# Altium PCB Motor_driver.PcbDoc
Units mm, origin at the board's own origin, x right, y up, seen from the top; angles counter-clockwise.
Board outline 147.7 x 29 mm, 2 copper layers (Top Layer, Bottom Layer); 34 components, 32 nets, 129 pads, 250 vias.
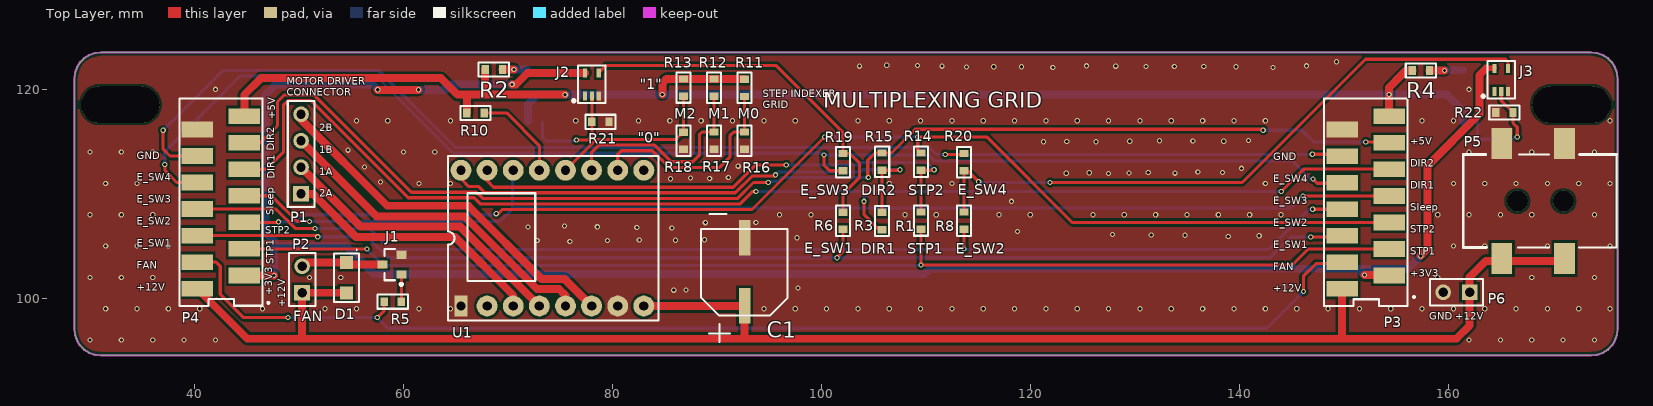
[diagram p0: Top Layer view]
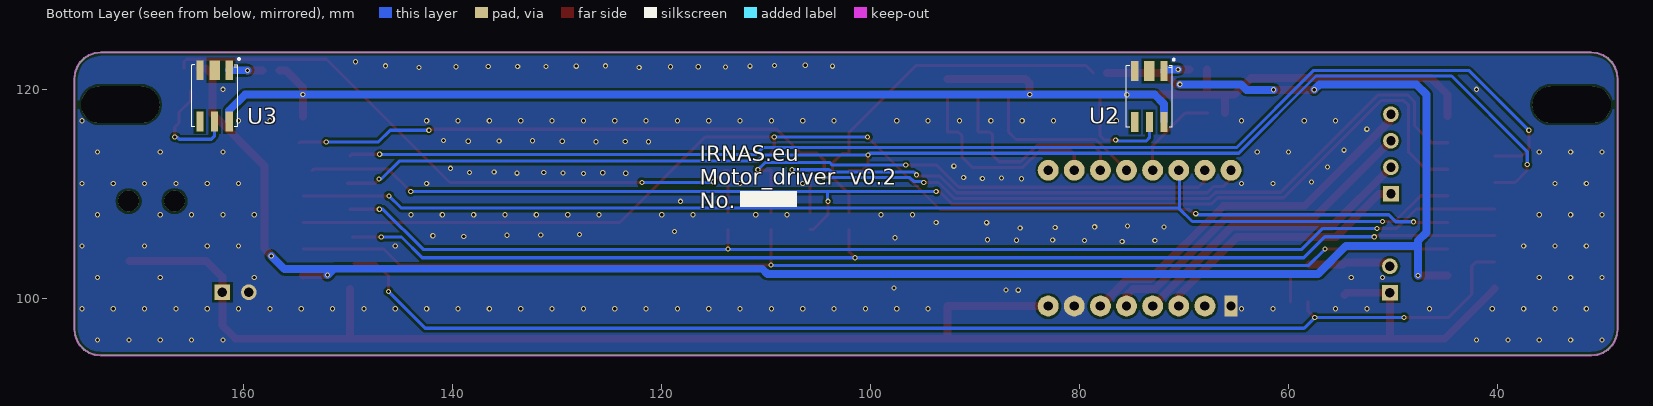
[diagram p1: Bottom Layer view, seen from below]

## Layer stack, top to bottom
Top Solder: solder mask 0.0102, Solder Resist, Dk 3.5
Top Layer: signal copper 0.0356
Dielectric 1: dielectric 0.32, FR-4, Dk 4.8
Bottom Layer: signal copper 0.0356
Bottom Solder: solder mask 0.0102, Solder Resist, Dk 3.5

## Board outline
28.512,121.032 28.512,97.032 28.575,96.476 28.76,95.947 29.057,95.473 29.453,95.078 29.927,94.78 30.456,94.595 31.012,94.532 173.712,94.532 174.268,94.595 174.797,94.78 175.271,95.078 175.667,95.473 175.964,95.947 176.149,96.476 176.212,97.032 176.212,121.032 176.149,121.588 175.964,122.117 175.667,122.591 175.271,122.987 174.797,123.285 174.268,123.469 173.712,123.532 31.012,123.532 30.456,123.469 29.927,123.285 29.453,122.987 29.057,122.591 28.76,122.117 28.575,121.588

## Design rules (kind name [scope] priority, off if disabled: settings)
Clearance [All] p1: gap=0.229 ignorepadtopadclearanceinfootprint=FALSE except(0: Arc-Hole Track-Hole SMDPad-Hole THPad-Hole Via-Hole Fill-Hole Poly-Hole Region-Hole Text-Hole)
HoleSize [All] p1: absolutevalues=TRUE maxlimit=8 minlimit=0.025 maxpercent=80.000 minpercent=20.000
PlaneConnect [All] p1: planeconnectstyle=Direct reliefexpansion=0.508 reliefentries=4 reliefconductorwidth=0.254 reliefairgap=0.254
PolygonConnect [All] p1: connectstyle=Direct reliefconductorwidth=0.254 reliefentries=4 polygonreliefangle="90 Angle" airgapwidth=0.254
RoutingVias [All] p1: holewidth=0.3 width=0.5 viastyle="Through Hole" minholewidth=0.3 minwidth=0.5 maxholewidth=0.3 maxwidth=0.5
SilkToSilkClearance [All] p1: silktosilkclearance=0.15
SilkToSolderMaskClearance [IsPad] p1: minsilkscreentomaskgap=0.1 clearancetoexposedcopper=TRUE
SolderMaskExpansion [All] p1: expansion=0.102
Width [All] p1: maxlimit=0.762 minlimit=0.203 preferedwidth=0.254
26 further rules are at their usual default settings.

## Components (designator, comment, footprint, x,y, rotation, side; value= is the part's Value field where it differs from the comment)
C1 "100uF" EEEFK1J470P 92.65,101.23 r90 top
D1 "Schotky" SCHOTKY 54.46,101.83 r270 top
J1 "N-mosfet" SOT_Nmos 58.92,103.2 r180 top
J2 "Schmit trigger" SOT65P212X112-5N 78.04,120.48 r90 top
J3 "Schmit trigger" SOT65P212X112-5N 165.08,120.91 r90 top
P1 "Header 4" HDR1X4 50.2,110 r90 top
P2 "Header 2" HDR1X2 50.3,100.53 r90 top
P3 "micro_Match conn" micro_Match 152.16,108.68 r180 top
P4 "micro_Match conn" micro_Match 42.58,108.69 r180 top
P5 "FC68148S" "DC power connector" 168.68,109.25 r90 top
P6 "Header 2" HDR1X2 162.06,100.58 r180 top
R1 "0R" 0603res 109.43,107.33 r90 top
R2 "330R" 0603res 68.76,121.79 r180 top
R3 "0R" 0603res 105.7,107.29 r90 top
R4 "330R" 0603res 157.5,121.7 r180 top
R5 "10K" 0603res 58.87,99.79 r0 top
R6 "0R" 0603res 101.95,107.31 r90 top
R8 "0R" 0603res 113.54,107.32 r90 top
R10 "10K" 0603res 67.01,117.63 r180 top
R11 "0R" 0603res 92.53,120.04 r90 top
R12 "0R" 0603res 89.61,120.05 r90 top
R13 "0R" 0603res 86.68,120.06 r90 top
R14 "0R" 0603res 109.67,113.19 r270 top
R15 "0R" 0603res 105.94,113.19 r270 top
R16 "0R" 0603res 92.52,114.98 r90 top
R17 "0R" 0603res 89.61,114.98 r90 top
R18 "0R" 0603res 86.68,114.97 r90 top
R19 "0R" 0603res 101.95,112.92 r90 top
R20 "0R" 0603res 113.77,113.14 r270 top
R21 "10K" 0603res 78.97,116.78 r180 top
R22 "10K" 0603res 165.275,117.905 r0 top
U1 "Polulu-DRV8825" DIP16 65.51,99.26 r90 top
U2 "END_SW" END_SWITCH 73.32,121.77 r270 bottom
U3 "END_SW" END_SWITCH 162.8,121.83 r270 bottom

## Footprints (in the part's own frame and the unit in brackets; to place one, negate y for a bottom-side part, rotate by r counter-clockwise, add the part's x,y. Pads: shape width x height; smd on the part's side, far side on the other; paste and mask are expansions set on the pad)
0603res [mm]
  rect 0.7x0.85 smd: 1(-0.715,-0.115) 2(0.935,-0.115)
  silkscreen extent -1.34,-0.79 1.56,0.56, body extent -0.69,-0.52 0.91,0.28, height 0.6
"DC power connector" [mm]
  rect 3x2 smd: 1(-5.439,-2.451) 2(-5.439,3.549) 3(5.561,3.549) 4(5.561,-2.451)
  round 2 hole 2 unplated: 5(0.061,-2.351) 6(0.061,2.049)
  silkscreen extent -4.39,-7.45 4.51,7.25
DIP16 [mm]
  rect 2x1.2 hole 0.9: 1(0,0)
  round 2 hole 0.9: 2(0,-2.5) 3(0,-5) 4(0,-7.5) 5(0,-10) 6(0,-12.5) 7(0,-15) 8(0,-17.5) 9(13,-17.5) 10(13,-15) 11(13,-12.5) 12(13,-10) 13(13,-7.5) 14(13,-5) 15(13,-2.5) 16(13,0)
  silkscreen extent -1.4,-18.92 14.35,1.25
EEEFK1J470P [mm]
  rect 3.4x1.1 smd: 1(-1.96,0) 2(4.55,0)
  silkscreen extent -5.43,-4.12 6.84,4.18, body extent -3.65,-4.15 6.25,4.15, height 10.21
END_SWITCH [mm]
  rect 1.9x0.7 smd: 1(0,1.4) 3(0,-1.4) 4(4.9,-1.4) 5(4.9,0) 6(4.9,1.4)
  rect 1.9x1 smd: 2(0,0)
  silkscreen extent -1.14,-2.2 5.41,2.39, body extent -0.52,-2.2 5.42,2.18, height 4
HDR1X2 [mm] "Connector; Header; 2 Position"
  rect 1.5x1.5 hole 0.9: 1(0,0)
  round 1.5 hole 0.9: 2(2.54,0)
  silkscreen extent -1.27,-1.27 3.81,1.27
HDR1X4 [mm] "Connector; Header; 4 Position"
  rect 1.5x1.5 hole 0.9: 1(0,0)
  round 1.5 hole 0.9: 2(2.54,0) 3(5.08,0) 4(7.62,0)
  silkscreen extent -1.27,-1.27 8.89,1.27
micro_Match [mm]
  rect 3x1.5 smd: 1(-2.19,6.5) 2(-2.19,3.96) 3(-2.19,1.42) 4(-2.19,-1.12) 5(-2.19,-3.66) 6(-2.19,-6.2) 7(-2.19,-8.74) 8(2.31,-7.47) 9(2.31,-4.93) 10(2.31,-2.39) 11(2.31,0.15) 12(2.31,2.69) 13(2.31,5.23) 14(2.31,7.77)
  silkscreen extent -4.62,-10.43 4.03,9.42, body extent -3.47,-10.38 3.53,9.33, height 5
SCHOTKY [mm]
  rect 1.25x1.22 smd: 1(-1.615,0.09) 2(1.335,0.09)
  silkscreen extent -2.86,-1.11 2.19,1.29, body extent -1.81,-0.81 1.53,0.99, height 1
SOT65P212X112-5N [mm] "SOT23, 5-Leads, Body 2.05x2.13mm, Pitch 0.65mm, IPC Medium Density"
  rect 0.85x0.4 smd: 1(-1.1,0.65) 2(-1.1,0) 3(-1.1,-0.65) 4(1.1,-0.65) 5(1.1,0.65)
  silkscreen extent -1.79,-1.32 1.82,1.85, body extent -1.12,-1.12 1.12,1.13, height 1.12
SOT_Nmos [mm]
  rect 0.97x0.8 smd: 1(-0.88,0.92) 2(-0.88,-0.98) 3(0.92,-0.03)
  silkscreen extent -1.01,-1.53 0.72,1.99, body extent -1.3,-1.53 1.34,1.47, height 1.12

## Part data
C1: "Cap Aluminum Lytic 100uF 50V 20% (8 X 10.2mm) SMD 350mA 2000h 105C Automotive T/R", Capacitance="100 µF", Lifetime@Temperature="2000 Hrs @ 105°C", Manufacturer=Panasonic, Manufacturer Part Number=EEE-FK1H101P, Operating Temp-Max="105 °C", Operating Temp Range="-55 to +105 °C", Rated Voltage="50 V", Ripple Current="350 mA", Supplier Part Number 1=9695958, Dimension="Ø 8 x 10.2 mm", Impedance="0.34 O", Series=FK, Stock 1=0, Supplier 1=Farnell, Type=V-Chip
D1: library part NRVTS245ESFT1G, "ON SEMICONDUCTOR         NRVTS245ESFT1G             Schottky Rectifier, Single, 45 V, 2 A, SOD-123, 2 Pins, 650 mV", If - Forward Current="2 A", Ifsm - Forward Surge Current="50 A", Ir - Reverse Current="75 uA", Manufacturer="ON Semiconductor", Maximum Operating Temperature="+ 175 C", Minimum Operating Temperature="- 65 C", Package / Case=SOD-123FL-2, Supplier Part Number 1=2473409, Vf - Forward Voltage="650 mV", Vr - Reverse Voltage="45 V", Brand="ON Semiconductor", Configuration=Single, Factory Pack Quantity=3000, Manufacturer Part Number=NRVTS245ESFT1G, Mounting Style=SMD/SMT, Packaging=Reel, Pricing 1="5=0.195, 25=0.14, 100=0.0844, 250=0.0724, 500=0.0605, 1000=0.0485, 5000=0.0455 (EUR)", Product="Schottky Rectifiers", Product Category="Schottky Diodes & Rectifiers", RoHS=True, Stock 1=14714, Supplier 1=Farnell, Technology=Si, Vrrm - Repetitive Reverse Voltage="45 V"
J1: library part IRLML6346TRPBF, "INFINEON         IRLML6346TRPBF.             MOSFET Transistor, N Channel, 3.4 A, 30 V, 0.046 ohm, 4.5 V, 800 mV", Current - Continuous Drain (Id) @ 25°C="3.4A (Ta)", Drain to Source Voltage (Vdss)=30V, Input Capacitance (Ciss) @ Vds="270pF @ 24V", Manufacturer=Infineon, Operating Temperature="-55°C ~ 150°C (TJ)", Package / Case="TO-236-3, SC-59, SOT-23-3", Power - Max=1.3W, Supplier Device Package=Micro3™/SOT-23, Supplier Part Number 1=1857300, Category="Discrete Semiconductor Products", Family="Transistors - FETs, MOSFETs - Single", FET Feature=Standard, FET Type="MOSFET N-Channel, Metal Oxide", Gate Charge (Qg) @ Vgs="2.9nC @ 4.5V", Manufacturer Part Number=IRLML6346TRPBF, Mounting Type="Surface Mount", Packaging="Tape & Reel (TR)", Part Status=Active, Pricing 1="5=0.242, 25=0.176, 100=0.11, 250=0.0975, 500=0.0849, 1000=0.0724, 5000=0.0617 (EUR)", Rds On (Max) @ Id, Vgs="63 mOhm @ 3.4A, 4.5V", Series=HEXFET®, Stock 1=11546, Supplier 1=Farnell, Vgs(th) (Max) @ Id="1.1V @ 10µA"
J2 J3: library part 74AHC1G14GW@125, "74AHC1G14GW@125", Manufacturer="NXP Semiconductors", Supplier Part Number 1=1085241, Manufacturer Part Number=74AHC1G14GW@125, Pricing 1="5=0.153, 50=0.108, 100=0.062, 250=0.059, 500=0.043 (EUR)", Stock 1=10993, Supplier 1=Farnell
P1: "Header, 4-Pin", LatestRevisionDate=17-Jul-2002, LatestRevisionNote="Re-released for DXP Platform.", Publisher="Altium Limited"
P2 P6: "Header, 2-Pin", LatestRevisionDate=17-Jul-2002, LatestRevisionNote="Re-released for DXP Platform.", Publisher="Altium Limited"
P3 P4: library part micro_Match, "AMP FROM TE CONNECTIVITY         1-2178711-4             Wire-To-Board Connector, Micro-MaTch Value-Line Series, 14 Contacts, Receptacle, 1.27 mm", Manufacturer="TE Connectivity AMP", Manufacturer Part Number=1-2178711-4, Supplier Part Number 1=2473362, Body Orientation=Straight, Contact Material="Copper Alloy", Mounting Type="Surface Mount", Number of Contacts=14, Number of Rows=2, Pitch=1.27mm, Pricing 1="1=1.24, 25=1.15, 70=1.06, 200=0.977, 450=0.89 (EUR)", Series=Micro-MaTch, Stock 1=904, Supplier 1=Farnell, Termination Method=Solder, Type="Board to Board"
P5: library part "DC 2.1mm power connector", "DC 2.1mm connector", Current Rating=2A, Manufacturer=Cliff, Supplier Part Number 1=1889309, Voltage Rating=12V, Barrel Inner Diameter=-, Barrel Length=-, Barrel Outer Diameter=6.4mm, ComponentLink1Description=http://www.farnell.com/datasheets/1864271.pdf, ComponentLink1URL=http://www.farnell.com/datasheets/1864271.pdf, Connector Mounting="Surface Mount", Contact Termination Type="Surface Mount", Gender=Jack, Manufacturer Part Number=FC68148S, Pin Diameter=2.1mm, Product Range=-, Stock 1=0, Supplier 1=Farnell, SVHC="No SVHC (17-Dec-2015)"
R1 R3 R6 R8 R11 R12 R13 R14 R15 R16 R17 R18 R19 R20: "RES SMD 0.0OHM JUMPER 1/20W 0201", Case Code - in=0201, Case Code - mm=0603, Manufacturer=Vishay, Manufacturer Part Number=CRCW02010000Z0ED, Operating Temperature Range="- 55 C to + 155 C", Package / Case="0201 (0603 metric)", Resistance="0 Ohms", Supplier Part Number 1=2139811, Brand="Vishay / Dale", ComponentLink1Description=https://datasheet.ciiva.com/2471/crcw0201e3-2471712.pdf, ComponentLink1URL=https://datasheet.ciiva.com/2471/crcw0201e3-2471712.pdf, ComponentLink2Description=https://datasheet.ciiva.com/2471/crcw0201e3-2471713.pdf, ComponentLink2URL=https://datasheet.ciiva.com/2471/crcw0201e3-2471713.pdf, ComponentLink3Description=https://datasheet.ciiva.com/7841/1719906-7841430.pdf, ComponentLink3URL=https://datasheet.ciiva.com/7841/1719906-7841430.pdf, ComponentLink4Description=https://datasheet.ciiva.com/7841/1719906-7841431.pdf, ComponentLink4URL=https://datasheet.ciiva.com/7841/1719906-7841431.pdf, ComponentLink5Description=https://datasheet.ciiva.com/22665/1847332-22665688.pdf, ComponentLink5URL=https://datasheet.ciiva.com/22665/1847332-22665688.pdf, ComponentLink6Description=https://datasheet.ciiva.com/16757/70202042-16757849.pdf, ComponentLink6URL=https://datasheet.ciiva.com/16757/70202042-16757849.pdf, ComponentLink7Description=https://datasheet.ciiva.com/16436/crcw0201e3-16436237.pdf, ComponentLink7URL=https://datasheet.ciiva.com/16436/crcw0201e3-16436237.pdf, ComponentLink8Description=https://datasheet.ciiva.com/2471/crcw0201e3-2471711.pdf, ComponentLink8URL=https://datasheet.ciiva.com/2471/crcw0201e3-2471711.pdf, Factory Pack Quantity=10000, Height="0.23 mm", Length="0.6 mm", Packaging=Reel, Product="Thick Film Resistors Zero-Ohm", Product Category="Thick Film Resistors - SMD", RoHS=Details, Series=CRCW, Stock 1=0, Supplier 1=Farnell, Termination Style=SMD/SMT, Unit Weight="0.000006 oz", Width="0.3 mm"
R2 R4: "RES SMD 330 OHM 0.1% 1/10W 0603", Manufacturer="Panasonic Electronic Components", Manufacturer Part Number=ERA-3AEB331V, Operating Temperature="-55°C ~ 155°C", Package / Case="0603 (1608 Metric)", Power (Watts)="0.1W, 1/10W", Supplier Device Package=0603, Supplier Part Number 1=P330DBTR-ND, Temperature Coefficient=±25ppm/°C, Tolerance=±0.1%, Category=Resistors, ComponentLink1Description=https://industrial.panasonic.com/cdbs/www-data/pdf/RDM0000/AOA0000C307.pdf, ComponentLink1URL=https://industrial.panasonic.com/cdbs/www-data/pdf/RDM0000/AOA0000C307.pdf, Composition="Thin Film", Failure Rate=-, Features="Automotive AEC-Q200", Height - Seated (Max)="0.022\" (0.55mm)", Packaging="Tape & Reel (TR)", Part Status=Active, Pricing 1="5000=0.03717, 10000=0.03469, 25000=0.03422 (USD)", RoHS="RoHS Compliant", Size / Dimension="0.063\" L x 0.032\" W (1.60mm x 0.80mm)", Stock 1=125000, Supplier 1=Digi-Key
R5 R10 R21 R22: "RES SMD 10K OHM 1% 1/20W 0201", Case Code - in=0201, Case Code - mm=0603, Manufacturer=Vishay, Manufacturer Part Number=CRCW020110K0FNED, Operating Temperature Range="- 55 C to + 155 C", Package / Case="0201 (0603 metric)", Power Rating="50 mW", Resistance="10 kOhms", Supplier Part Number 1=2140192, Temperature Coefficient="200 PPM / K", Tolerance="1 %", Voltage Rating="30 V", Brand="Vishay / Dale", ComponentLink1Description=https://datasheet.ciiva.com/2474/crcw0201e3-2474818.pdf, ComponentLink1URL=https://datasheet.ciiva.com/2474/crcw0201e3-2474818.pdf, ComponentLink2Description=https://datasheet.ciiva.com/2474/crcw0201e3-2474819.pdf, ComponentLink2URL=https://datasheet.ciiva.com/2474/crcw0201e3-2474819.pdf, ComponentLink3Description=https://datasheet.ciiva.com/2474/crcw0201e3-2474820.pdf, ComponentLink3URL=https://datasheet.ciiva.com/2474/crcw0201e3-2474820.pdf, ComponentLink4Description=https://datasheet.ciiva.com/22692/1719906-22692709.pdf, ComponentLink4URL=https://datasheet.ciiva.com/22692/1719906-22692709.pdf, ComponentLink5Description=https://datasheet.ciiva.com/7983/1719906-7983319.pdf, ComponentLink5URL=https://datasheet.ciiva.com/7983/1719906-7983319.pdf, ComponentLink6Description=https://datasheet.ciiva.com/22868/70202042-22868839.pdf, ComponentLink6URL=https://datasheet.ciiva.com/22868/70202042-22868839.pdf, ComponentLink7Description=https://datasheet.ciiva.com/7983/1719906-7983320.pdf, ComponentLink7URL=https://datasheet.ciiva.com/7983/1719906-7983320.pdf, ComponentLink8Description=https://datasheet.ciiva.com/16436/dcrcwe3-16436222.pdf, ComponentLink8URL=https://datasheet.ciiva.com/16436/dcrcwe3-16436222.pdf, Height="0.23 mm", Length="0.6 mm", Packaging=Reel, Pricing 1="10=0.0338, 100=0.0237, 500=0.0124, 2500=0.0092, 5000=0.0076 (EUR)", Product="Thick Film Resistors SMD", Product Category="Thick Film Resistors", RoHS=True, Series=CRCW, Stock 1=2600, Supplier 1=Farnell, Termination Style=SMD/SMT, Unit Weight="0.000006 oz", Width="0.3 mm"
U1: library part DRV8825
U2 U3: library part TCUT1300X01, "SENSOR OPTO SLOT 3MM TRANS SMD", Collector-Emitter Voltage="20 V", Collector Current (DC)="0.02 A", Forward Current="25 mA", Manufacturer="Vishay Semiconductors", Operating Temperature Classification=Industrial, Operating Temp Range="-40C to 85C", Package Type=SMD, Power Dissipation="0.075 W", Reverse Breakdown Voltage="5 V", Supplier Part Number 1=2251270, Collector Current (DC) (Max)="0.02 A", ComponentLink1Description=https://datasheet.ciiva.com/6858/tcut1300-6858353.pdf, ComponentLink1URL=https://datasheet.ciiva.com/6858/tcut1300-6858353.pdf, ComponentLink2Description=https://datasheet.ciiva.com/4423/tcut1300-96295-4423538.pdf, ComponentLink2URL=https://datasheet.ciiva.com/4423/tcut1300-96295-4423538.pdf, ComponentLink3Description=https://datasheet.ciiva.com/11772/0900766b80ed1f8e-11772595.pdf, ComponentLink3URL=https://datasheet.ciiva.com/11772/0900766b80ed1f8e-11772595.pdf, ComponentLink4Description=https://datasheet.ciiva.com/15117/getdatasheetpartid-248339-15117059.pdf, ComponentLink4URL=https://datasheet.ciiva.com/15117/getdatasheetpartid-248339-15117059.pdf, ComponentLink5Description=https://datasheet.ciiva.com/2823/tcut1300-2823075.pdf, ComponentLink5URL=https://datasheet.ciiva.com/2823/tcut1300-2823075.pdf, ComponentLink6Description=https://datasheet.ciiva.com/2823/tcut1300-2823076.pdf, ComponentLink6URL=https://datasheet.ciiva.com/2823/tcut1300-2823076.pdf, ComponentLink7Description=https://datasheet.ciiva.com/2823/tcut1300-2823077.pdf, ComponentLink7URL=https://datasheet.ciiva.com/2823/tcut1300-2823077.pdf, ComponentLink8Description=https://datasheet.ciiva.com/16493/tcut1300-16493702.pdf, ComponentLink8URL=https://datasheet.ciiva.com/16493/tcut1300-16493702.pdf, ComponentLink9Description=https://datasheet.ciiva.com/26184/tcut1300-26184396.pdf, ComponentLink9URL=https://datasheet.ciiva.com/26184/tcut1300-26184396.pdf, ComponentLink10Description=https://datasheet.ciiva.com/7657/tcut1300-7657886.pdf, ComponentLink10URL=https://datasheet.ciiva.com/7657/tcut1300-7657886.pdf, DELETED=Compliant, Fall Time="150000 ns", Gap Width="3 mm", Manufacturer Part Number=TCUT1300X01, Mounting="Surface Mount", Number of  Elements=2, Output Device=Phototransistor, Packaging="Tape and Reel", Pin Count=6, Pricing 1="1=1.17, 50=1.02, 100=0.884, 500=0.744, 1000=0.571 (EUR)", Rad Hardened=No, Rise Time="150000 ns", Slit Width="0.3 mm", Stock 1=2041, Supplier 1=Farnell, Type=Transmissive

## Free pads (board coordinates)
  oval 7.5x3.5 hole 3.5 slot 7.5 at 0 deg unplated: 1(32.91,118.53) 1(171.81,118.53)

## Via types
v1: diameter 0.5, hole 0.3, Top Layer to Bottom Layer, tented both sides, 249 vias
v2: diameter 0.5, hole 0.3, Top Layer to Bottom Layer, 1 vias

## Nets (pads, with @x,y where several pads share a name; then routed paths per layer and width w, separated by ;. In a path a pad name is that pad's centre, name@x,y a point inside that pad or via, vN(x,y) a via of type N, cw(c..) or ccw(c..) an arc to the next point about the centre after c; other vN are vias at no path point)
1A: P1.2 U1.4 | length 28.3
  Top Layer w0.762: P1.2 55.879,106.861 65.409,106.861 U1.4
1B: P1.3 U1.5 | length 32.8
  Top Layer w0.762: P1.3 57.429,107.851 65.82,107.851 72.801,100.87 74.91,100.87 75.51,100.27 U1.5 U1.5@75.12,99.26
2A: P1.1 U1.3 | length 25.4
  Top Layer w0.762: P1.1 51.339,110 55.469,105.87 64.93,105.87 70.51,100.29 U1.3
2B: P1.4 U1.6 | length 35.7
  Top Layer w0.762: P1.4 50.2,117.11 58.45,108.86 66.212,108.86 73.212,101.86 75.41,101.86 U1.6
+3V3: J2.5 J3.5 P3.1 P4.1 | length 188.5
  Top Layer w0.5: 163.64,122.01 J3.5
  Top Layer w0.762: P4.1 47.59,102.19 v1(47.61,102.17) ; v1(57.54,119.96) v1(61.43,119.96) ; v1(70.41,120.481) 70.791,120.481 71.89,121.58 J2.5 ; v1(151.99,102.23) 154.3,102.23 P3.1 ; v1@157.345,104.085 158.01,104.75 158.01,112.66 162.98,117.63 162.98,121.35 163.64,122.01
  Bottom Layer w0.762: v1(47.61,102.17) 47.61,105.51 46.81,106.31 46.81,119.51 47.77,120.47 57.05,120.47 v1@57.535,119.985 ; 47.624,105.024 54.496,105.024 57.19,102.33 109.886,102.33 110.386,102.83 151.39,102.83 151.43,102.79 ; v1(61.43,119.96) 64.03,119.96 64.551,120.481 v1(70.41,120.481) ; v1(151.99,102.23) 151.43,102.79 ; v1(157.37,104.06) 157.37,104.04 156.12,102.79 151.43,102.79
+5V: P3.7 P4.7 R2.2 R4.2 R10.2 R11.2 R12.2 R13.2 U2.6 U3.6 | length 146.3
  Top Layer w0.762: P4.7 44.77,119.48 46.36,121.07 63.59,121.07 65.17,119.49 65.88,119.49 ; R10.2 66.075,119.295 65.88,119.49 ; R2.2 67.825,119.645 67.67,119.49 ; v1(75.48,119.49) 67.67,119.49 ; v1(84.78,119.51) 84.78,120.59 85.185,120.995 R13.2 92.625,120.995 R11.2 ; P3.7 v1(154.35,119.5) 154.35,120.18 155.495,121.325 155.495,121.335 155.975,121.815 R4.2 ; 65.88,119.49 67.67,119.49
  Bottom Layer w0.762: U2.6@71.92,116.99 71.92,118.6 72.81,119.49 v1@75.44,119.49 ; v1(75.48,119.49) 159.9,119.49 161.4,117.99 U3.6
+12V: C1.1 D1.2 P2.1 P3.14 P4.14 P5.1 P5.2 P6.1 U1.8 | length 165
  Top Layer w0.762: P4.14 45.06,96.13 50.3,96.13 ; D1.2@54.66,100.305 54.435,100.53 P2.1 50.3,96.13 ; U1.8 92.64,99.26 C1.1 92.65,96.23 92.55,96.13 ; 149.78,96.14 149.85,96.21 P3.14 ; P5.1@170.957,103.59 163.61,103.59 162.06,102.04 P6.1 162.06,97.41 160.78,96.13 92.55,96.13 ; 50.3,96.13 92.55,96.13
DIR: R3.2 R15.2 U1.16 | length 50.2
  Top Layer w0.305: U1.16 65.51,111.43 66.251,110.689 67.21,110.689 67.798,110.1 91.776,110.1 93.387,111.711 95.611,111.711 v1(95.611,111.819) ; R3.2 105.815,112.245 R15.2 107.485,112.255 v1(107.54,112.31)
  Bottom Layer w0.305: v1(95.611,111.819) 95.892,112.1 103.77,112.1 103.98,112.31 v1(107.54,112.31)
DIR1: P3.5 P4.5 R3.1 | length 124.2
  Top Layer w0.305: P4.5 46.88,112.35 48.512,113.982 48.512,118.475 48.957,118.92 51.16,118.92 60.458,109.622 66.768,109.622 67.357,109.033 92.233,109.033 93.43,110.23 v1(93.73,110.23) ; v1(104.09,109.28) 104.09,108.01 105.525,106.575 R3.1 ; v1(144.02,110.23) 144.05,110.23 146.21,112.39 153.29,112.39 P3.5@153.46,112.22
  Bottom Layer w0.305: v1(93.73,110.23) 104.12,110.23 ; v1(104.09,109.28) 104.12,109.31 104.12,110.23 ; v1(144.02,110.23) 104.12,110.23
DIR2: P3.6 P4.6 R15.1 | length 121.6
  Top Layer w0.305: P4.6 46.31,114.89 47.95,116.53 47.95,118.83 48.573,119.453 51.467,119.453 60.765,110.155 66.989,110.155 67.578,109.567 91.997,109.567 93.51,111.08 v1(94.92,111.08) ; v1(104.5,111.56) 104.45,111.61 104.45,113.22 105.135,113.905 R15.1 106.715,113.905 108.99,116.18 142.2,116.18 v1(142.29,116.09) ; v1(152.11,114.95) 154.63,114.95 P3.6@154.71,114.87
  Bottom Layer w0.305: v1(94.92,111.08) 95.028,111.188 95.872,111.188 96.242,111.558 96.242,111.56 v1(104.5,111.56) ; v1(142.29,116.09) 146,116.09 147.13,114.96 152.1,114.96 v1(152.11,114.95)
E_SW1: P3.12 P4.12 R6.1 | length 114
  Top Layer w0.305: P4.12 51.68,106 v1(51.797,105.883) ; v1(101.49,103.88) 102.065,104.455 R6.1 ; v1(146.84,105.87) 149.56,105.87 P3.12@149.58,105.85
  Bottom Layer w0.305: v1(51.797,105.883) 56.527,105.883 58.53,103.88 v1(101.49,103.88) 142.92,103.88 144.91,105.87 v1(146.84,105.87)
E_SW1-1: J2.4 R6.2 R19.2 | length 35.7
  Top Layer w0.305: J2.4 79.38,122.27 95.7,122.27 102.065,115.905 R19.2 102.745,113.855 103.64,112.96 103.64,111.54 102.065,109.965 R6.2
E_SW1-2: J3.4 R8.2 R20.2 | length 62.2
  Top Layer w0.305: R8.2@113.655,108.225 R8.2 R20.2 114.015,112.205 v1(115.06,111.16) ; v1(121.9,111.08) 140.28,111.08 152.09,122.89 165.49,122.89 165.73,122.65 J3.4
  Bottom Layer w0.305: v1(115.06,111.16) 115.14,111.08 v1(121.9,111.08)
E_SW2: P3.11 P4.11 R8.1 | length 114.6
  Top Layer w0.305: P4.11 47.8,108.54 49.65,106.69 v1(51.53,106.69) ; R8.1@113.655,106.575 113.655,104.725 v1(113.66,104.72) ; v1(147.03,108.53) P3.11
  Bottom Layer w0.305: v1(51.53,106.69) 56.71,106.69 58.72,104.68 142.84,104.68 146.69,108.53 v1(147.03,108.53)
E_SW3: P3.10 P4.10 R19.1 | length 128.5
  Top Layer w0.305: v1@37.19,112.8 37.19,112.21 38.32,111.08 P4.10 ; v1(100.26,113.72) 100.26,112.74 100.795,112.205 R19.1 ; v1(147.05,111.42) 147.46,111.01 P3.10@150.05,111.01
  Bottom Layer w0.305: v1(37.16,112.8) 37.16,114.04 44.4,121.28 57.376,121.28 64.766,113.89 100.09,113.89 v1(100.26,113.72) 110.28,113.72 110.871,113.129 145.141,113.129 146.85,111.42 v1(147.05,111.42)
E_SW4: P3.9 P4.9 R20.1 | length 125.8
  Top Layer w0.305: v1(37.002,116.08) 37.002,114.278 37.66,113.62 P4.9 ; v1(111.86,113.76) 113.56,113.76 R20.1 ; v1(147,113.79) 149.67,113.79 P3.9
  Bottom Layer w0.305: v1(37.002,116.08) 42.736,121.813 57.597,121.813 64.987,114.423 110.331,114.423 110.994,113.76 v1(111.86,113.76) 146.97,113.76 v1(147,113.79)
FAN: P3.13 P4.13 R5.1 | length 118.6
  Top Layer w0.305: P4.13 42.07,103.46 42.46,103.07 42.46,100.4 44.71,98.15 v1(48.94,98.15) ; v1(57.49,98.15) 58.155,98.815 R5.1 ; v1(146.14,100.64) 146.14,102.11 147.35,103.32 P3.13@149.44,103.32
  Bottom Layer w0.305: v1(48.94,98.15) v1(57.49,98.15) 58.51,97.13 142.63,97.13 v1(146.14,100.64)
GND: C1.2 J1.2 J2.3 J3.3 P3.8 P4.8 P5.3 P5.4 P6.2 R16.1 R17.1 R18.1 R21.1 R22.1 U1.1 U1.7 U2.3 U3.3
  other v1: 30,96 33,96 36,96 39,96 42,96 162,96 165,96 168,96 171,96 174,96 31.5,99 34.5,99 37.5,99 40.5,99 46.5,99 52.5,99 55.5,99 61.5,99 64.5,99 94.5,99 97.5,99 100.5,99 103.5,99 106.5,99 109.5,99 112.5,99 115.5,99 118.5,99 121.5,99 124.5,99 127.5,99 130.5,99 133.5,99 136.5,99 139.5,99 142.5,99 145.5,99 148.5,99 151.5,99 154.5,99 157.5,99 160.5,99 163.5,99 166.5,99 169.5,99 172.5,99 175.5,99 85.88,100.78 87.06,100.8 97.78,100.98 30,102 33,102 36,102 51,102 54,102 159,102 168,102 174,102 31.5,105 34.5,105 37.5,105 145.5,105 160.5,105 163.5,105 169.5,105 175.5,105 75.93,105.45 72.8,105.52 79.53,105.52 86.05,105.56 82.58,105.58 88.81,105.61 97.66,105.79 138.95,105.92 141.91,105.99 134.82,106.04 131.58,106.07 127.88,106.11 118.78,106.4 85.69,106.73 82.34,106.78 71.93,106.82 78.56,106.84 75.43,106.93 88.9,107.24 93.73,107.26 30,108 33,108 36,108 96,108 99,108 108,108 111,108 117,108 120,108 126,108 129,108 132,108 135,108 138,108 141,108 144,108 159,108 162,108 165,108 168,108 174,108 118.2,109.28 31.5,111 34.5,111 61.5,111 64.5,111 106.5,111 112.5,111 142.5,111 160.5,111 163.5,111 166.5,111 169.5,111 172.5,111 175.5,111 57.81,111.13 85.56,111.44 89.31,111.48 87.47,111.52 91.1,111.57 127.5,111.95 123.44,111.97 129.45,111.99 133.85,111.98 125.64,112.02 131.29,112.03 138.41,112.05 136.04,112.09 140.21,112.44 56.28,112.58 92.04,112.65 30,114 33,114 36,114 60,114 63,114 162,114 168,114 174,114 54.7,114.18 121.27,114.98 126.29,114.99 123.49,115.02 129.52,115.03 138.52,115.03 135.56,115.06 132.37,115.08 140.9,115.1 52.51,116.19 55.5,117 58.5,117 64.5,117 76.5,117 82.5,117 85.5,117 88.5,117 91.5,117 94.5,117 97.5,117 103.5,117 106.5,117 109.5,117 112.5,117 115.5,117 118.5,117 121.5,117 124.5,117 127.5,117 130.5,117 133.5,117 136.5,117 139.5,117 142.5,117 157.5,117 160.5,117 175.5,117 42,120 162,120 122.16,122.1 143.24,122.09 113.89,122.13 116.5,122.16 119.17,122.16 139.69,122.16 131.07,122.18 136.6,122.18 133.79,122.19 103.65,122.22 111.55,122.22 128.18,122.22 125.39,122.25 146.43,122.25 109.21,122.28 106.26,122.31 149.32,122.64
NetD1_1: D1.1 J1.3 P2.2 | length 7.9
  Top Layer w0.762: P2.2 50.675,103.445 D1.1 54.765,103.23 J1.3
NetJ1_1: J1.1 R5.2 | length 2.6
  Top Layer w0.305: J1.1 59.805,102.275 R5.2
NetJ2_2: J2.2 R21.2 U2.5 | length 10.3
  Top Layer w0.305: v1(76.55,115.14) 77.62,115.14 78.035,115.555 R21.2 78.04,116.9 J2.2
  Bottom Layer w0.305: U2.5 73.32,115.35 73.6,115.07 v1@76.55,115.07
NetJ3_2: J3.2 R22.2 U3.5 | length 10.2
  Top Layer w0.305: J3.2 165.08,118.92 R22.2 166.21,116.771 166.61,116.371 v2(166.61,115.43)
  Bottom Layer w0.305: U3.5 162.8,115.55 163.12,115.23 166.19,115.23 v2@166.39,115.43
NetR2_1: R2.1 U2.1 | length 2.5
  Top Layer w0.762: R2.1 v1(70.57,121.905)
  Bottom Layer w0.762: v1(70.57,121.905) 71.785,121.905 U2.1
NetR4_1: R4.1 U3.1 | length 3.2
  Top Layer w0.762: R4.1 v1(159.643,121.815)
  Bottom Layer w0.762: v1(159.643,121.815) 159.658,121.83 U3.1
NetR10_1: R10.1 U1.13 | length 8.9
  Top Layer w0.305: R10.1 69.875,117.745 73.01,114.61 U1.13
NetR11_1: R11.1 R16.2 U1.10 | length 20.5
  Top Layer w0.305: U1.10 80.51,113.78 80.86,114.13 83.826,114.13 85.426,112.53 90.26,112.53 91.25,113.52 91.25,115.55 91.615,115.915 R16.2 92.645,115.925 R11.1
NetR12_1: R12.1 R17.2 U1.11 | length 20.1
  Top Layer w0.305: U1.11 78.01,113.97 78.703,114.663 84.047,114.663 85.647,113.063 87.693,113.063 88.33,113.7 88.33,115.67 88.575,115.915 R17.2 R12.1
NetR13_1: R13.1 R18.2 U1.12 | length 16.2
  Top Layer w0.305: U1.12 78.447,115.197 86.087,115.197 R18.2 R13.1
Sleep: P3.4 P4.4 U1.14 | length 115.3
  Top Layer w0.305: P4.4 47.36,109.81 49.82,107.35 v1(51.01,107.35) ; v1@146.07,109.8 v1(146.11,109.8) P3.4
  Bottom Layer w0.305: v1(51.01,107.35) 69.211,107.35 70.45,108.589 70.45,112.2 U1.14 ; 70.51,108.649 144.959,108.649 v1(146.11,109.8)
STP: R1.2 R14.2 U1.15 | length 50.6
  Top Layer w0.305: U1.15 68.01,111.25 68.626,110.634 91.555,110.634 93.671,112.75 v1(96.64,112.75) ; R1.2@109.555,108.245 R14.2 110.755,112.255 v1(110.8,112.3)
  Bottom Layer w0.305: v1(96.64,112.75) 103.666,112.75 103.916,113 110.1,113 v1(110.8,112.3)
STP1: P3.2 P4.2 R1.1 | length 114.3
  Top Layer w0.305: P4.2 56.51,104.73 v1(56.51,104.71) ; R1.1@109.555,106.595 109.53,106.57 v1(109.53,103.19) 145.06,103.19 146.59,104.72 P3.2
  Bottom Layer w0.305: v1(56.51,104.71) 58.07,103.15 109.49,103.15 v1(109.53,103.19)
STP2: P3.3 P4.3 R14.1 | length 118.1
  Top Layer w0.305: P4.3 48,107.27 v1(48.05,107.32) ; v1(68.89,108.1) 69.06,108.1 69.46,108.5 93.36,108.5 v1(100.3,115.44) ; R14.1 109.56,113.91 109.23,114.24 v1(109.23,115.45) 115.82,115.45 124.01,107.26 P3.3
  Bottom Layer w0.305: v1(48.05,107.32) 49.75,107.32 50.42,107.99 68.71,107.99 68.89,108.17 v1(68.89,108.1) ; v1(100.3,115.44) 100.31,115.45 v1(109.23,115.45)
pads on no net: J2.1 J3.1 P5.5 P5.6 U1.2 U1.9 U2.2 U2.4 U3.2 U3.4

## Polygon pours and split planes (outlines as drawn)
GND on Bottom Layer "BOTTOM_GND" (solid, remove dead copper, pour order 2): 28.512,121.032 28.512,97.032 28.575,96.476 28.76,95.947 29.057,95.473 29.453,95.078 29.927,94.78 30.456,94.595 31.012,94.532 173.712,94.532 174.268,94.595 174.797,94.78 175.271,95.078 175.667,95.473 175.964,95.947 176.149,96.476 176.212,97.032 176.212,121.032 176.149,121.588 175.964,122.117 175.667,122.591 175.271,122.987 174.797,123.285 174.268,123.469 173.712,123.532 31.012,123.532 30.456,123.469 29.927,123.285 29.453,122.987 29.057,122.591 28.76,122.117 28.575,121.588
GND on Top Layer "TOP_GND" (solid, remove dead copper, pour order 1): 28.512,121.032 28.512,97.032 28.575,96.476 28.76,95.947 29.057,95.473 29.453,95.078 29.927,94.78 30.456,94.595 31.012,94.532 173.712,94.532 174.268,94.595 174.797,94.78 175.271,95.078 175.667,95.473 175.964,95.947 176.149,96.476 176.212,97.032 176.212,121.032 176.149,121.588 175.964,122.117 175.667,122.591 175.271,122.987 174.797,123.285 174.268,123.469 173.712,123.532 31.012,123.532 30.456,123.469 29.927,123.285 29.453,122.987 29.057,122.591 28.76,122.117 28.575,121.588

## Keep-outs
Keep-Out Layer:
  the board outline again, w0.2

## Silkscreen, mask and mechanical layers (free items; w line width, h text height)
Top Overlay:
  text "\"1\"" at 82.64,120 h1
  text "MOTOR DRIVER / CONNECTOR" at 48.81,119.38 h0.7
  text "MULTIPLEXING GRID" at 100.19,118.22 h1.5
  text "STEP INDEXER / GRID" at 94.41,118.18 h0.7
  text "M2" at 85.945,117.21 h1
  text "M1" at 89.2,117.21 h1
  text "M0" at 92.01,117.2 h1
  text "+5V" at 47.73,117.15 h0.7 r90
  text "\"0\"" at 82.42,114.87 h1
  text "DIR2" at 47.62,114.13 h0.7 r90
  text "DIR1" at 47.68,111.46 h0.7 r90
  text "E_SW4" at 113.08,109.9 h1
  text "E_SW3" at 98,109.88 h1
  text "DIR2" at 103.81,109.88 h1
  text "STP2" at 108.34,109.88 h1
  text "2B /  / 1B /  / 1A /  / 2A" at 51.94,109.7 h0.7
  text "Sleep" at 47.61,107.96 h0.7 r90
  text "STP2" at 46.79,106.19 h0.7
  text "E_SW1" at 98.36,104.3 h1
  text "DIR1" at 103.781,104.28 h1
  text "STP1" at 108.24,104.26 h1
  text "E_SW2" at 112.86,104.26 h1
  text "STP1" at 47.61,103.26 h0.7 r90
  text "+5V /  / DIR2 /  / DIR1 /  / Sleep /  / STP2 /  / STP1 /  / +3V3" at 156.37,102.08 h0.7
  text "GND /  / E_SW4 /  / E_SW3 /  / E_SW2 /  / E_SW1 /  / FAN /  / +12V" at 34.49,100.73 h0.7
  text "GND /  / E_SW4 /  / E_SW3 /  / E_SW2 /  / E_SW1 /  / FAN /  / +12V" at 143.265,100.606 h0.7
  text "+3V3" at 47.43,100.3 h0.7 r90
  text "+12V" at 48.67,99.15 h0.7 r90
  text "GND +12V" at 158.19,97.97 h0.7
  text "FAN" at 49.47,97.8 h1
Bottom Overlay:
  rectangle: 107.04,108.749 112.51,110.28
  text "IRNAS.eu / Motor_driver  v0.2 / No." at 116.35,108.61 h1.5

## Dimensions
31.012,123.532 to 32.91,118.53 on Mechanical 1
32.91,118.53 to 28.512,121.032 on Mechanical 1
171.81,118.53 to 173.712,123.532 on Mechanical 1
171.81,118.53 to 176.212,121.032 on Mechanical 1
173.712,94.532 to 173.712,123.532 on Mechanical 1
28.512,121.032 to 176.212,121.032 on Mechanical 1